# Altium PCB 按键板.PcbDoc
Units mm, origin at the board's own origin, x right, y up, seen from the top; angles counter-clockwise.
Board outline 52 x 61 mm, 2 copper layers (Top Layer, Bottom Layer); 15 components, 16 nets, 80 pads, 0 vias.
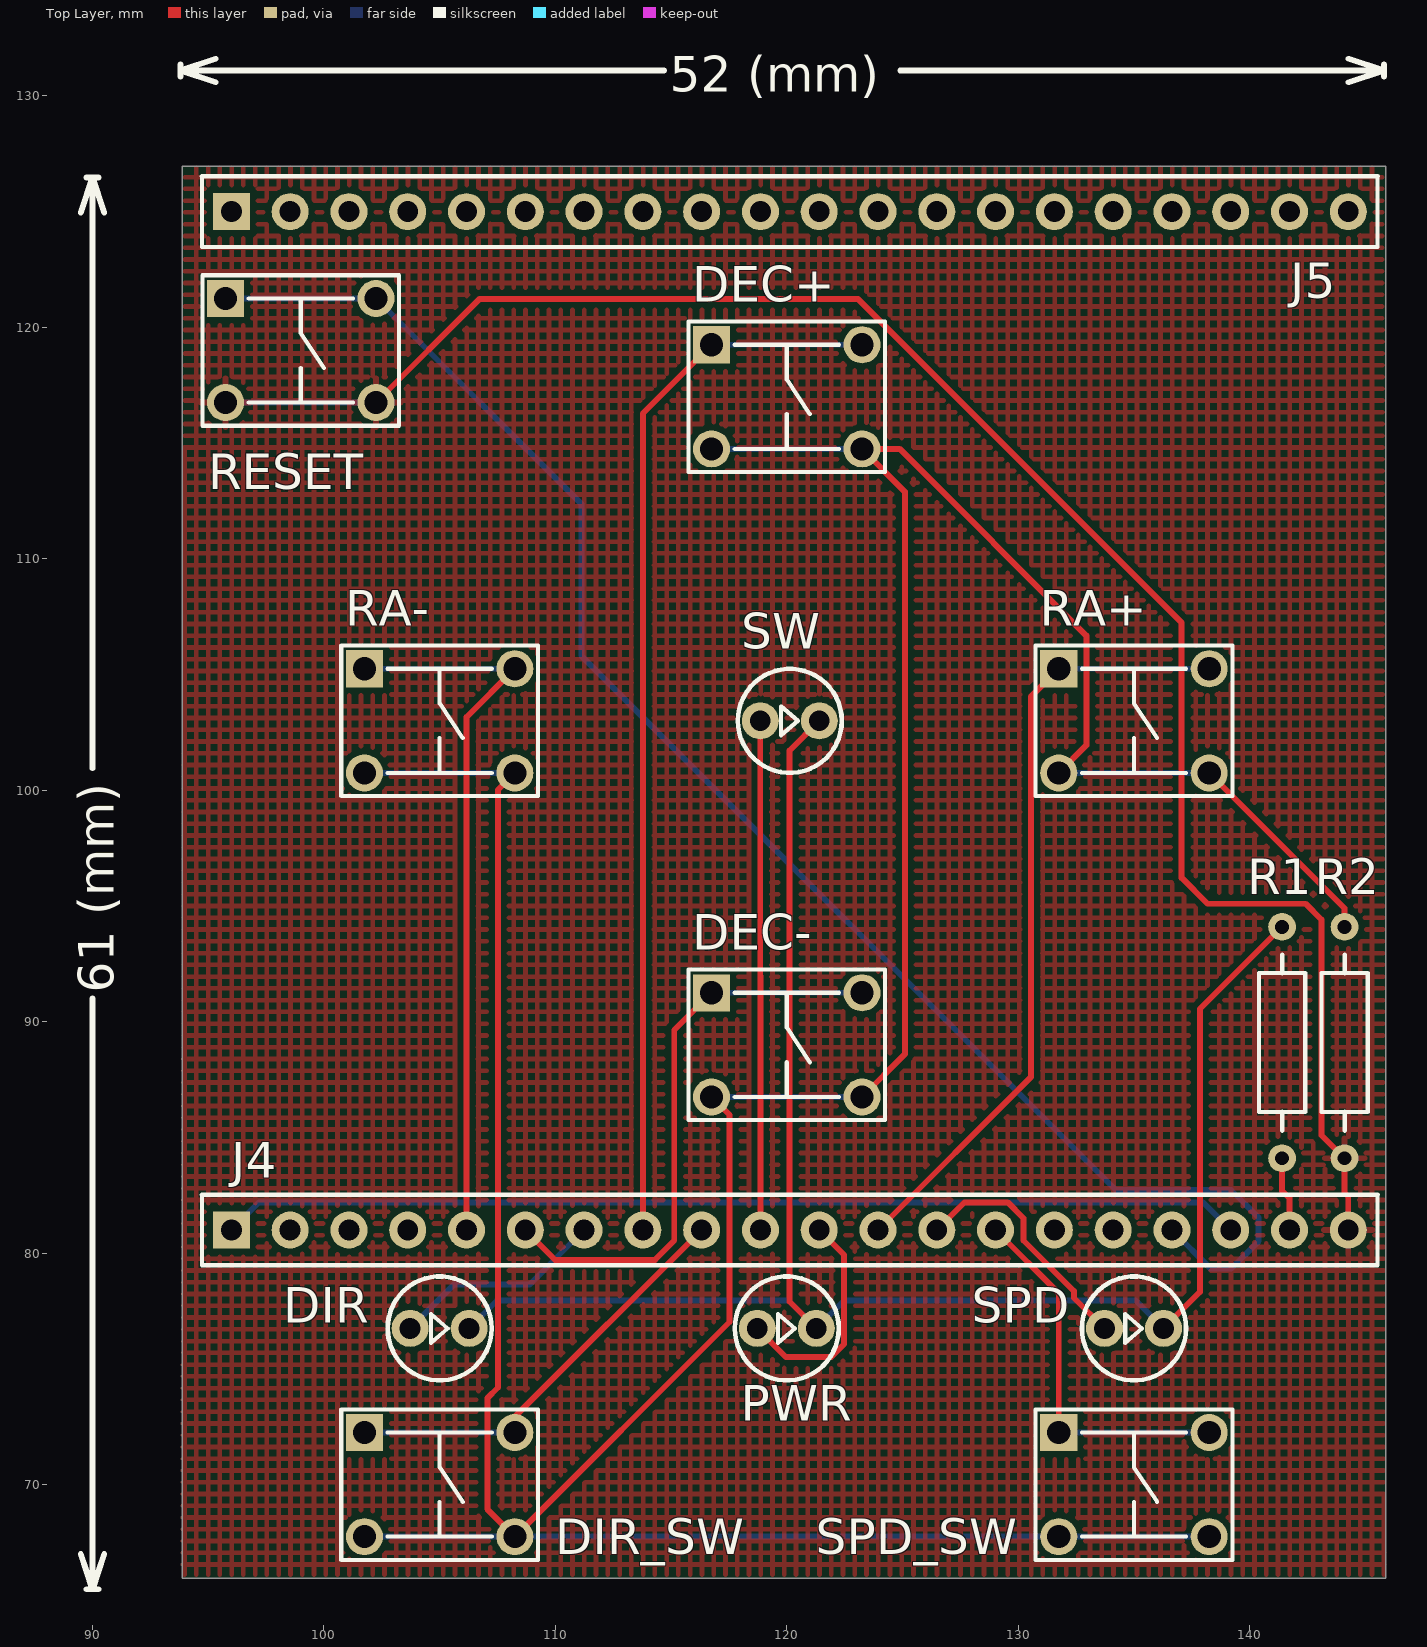
[diagram p0: Top Layer view]
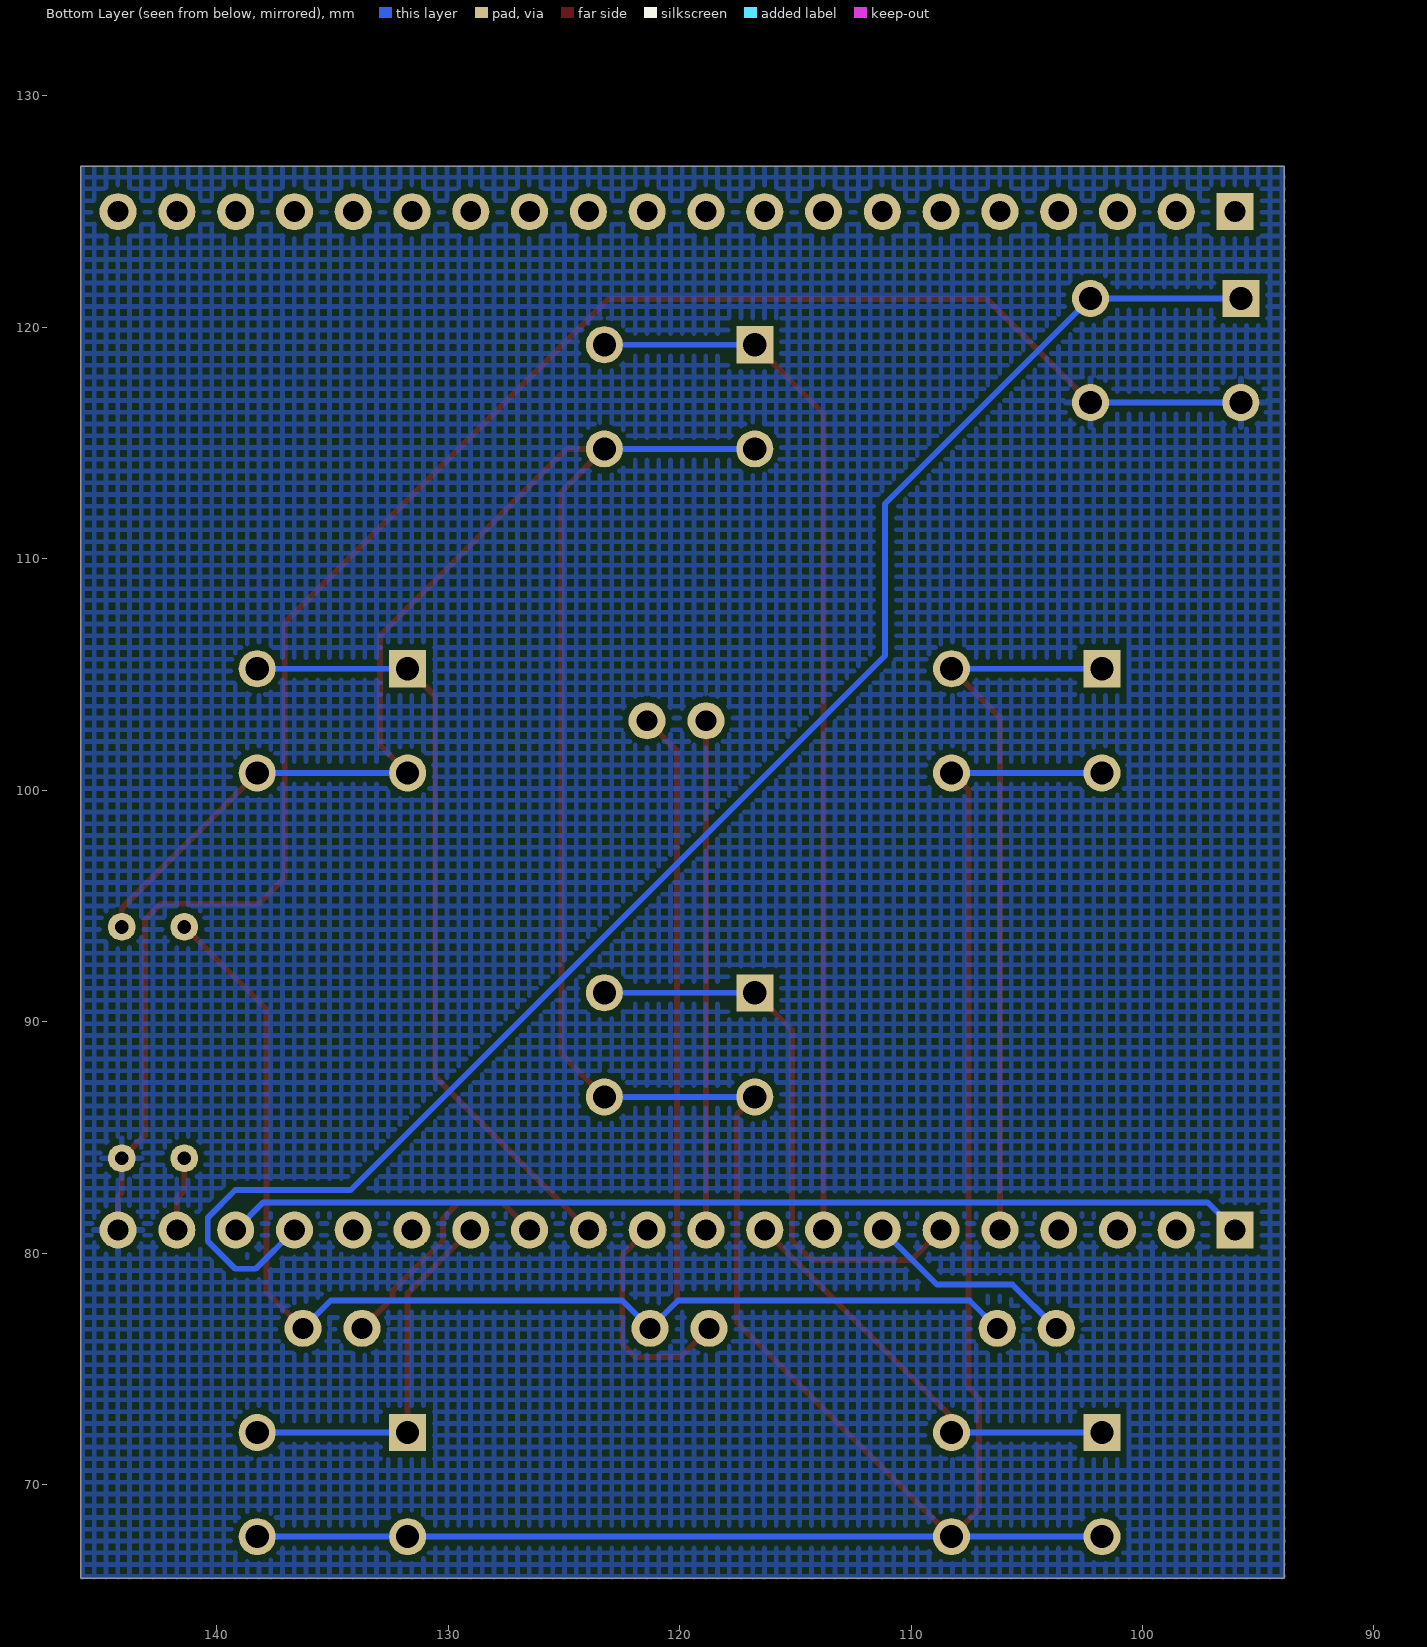
[diagram p1: Bottom Layer view, seen from below]

## Layer stack, top to bottom
Top Solder: solder mask 0.0102, Solder Resist, Dk 3.5
Top Layer: signal copper 0.0356
Dielectric 1: dielectric 0.32, FR-4, Dk 4.8
Bottom Layer: signal copper 0.0356
Bottom Solder: solder mask 0.0102, Solder Resist, Dk 3.5

## Board outline
93.875,65.952 93.875,126.952 145.875,126.952 145.875,65.952

## Design rules (kind name [scope] priority, off if disabled: settings)
Clearance [All] p1: gap=0.254
PolygonConnect [All] p1: connectstyle=Relief reliefconductorwidth=0.254 reliefentries=4 polygonreliefangle="90 Angle" airgapwidth=0.254
RoutingVias [All] p1: holewidth=0.711 width=1.27 viastyle="Through Hole" minholewidth=0.711 minwidth=1.27 maxholewidth=0.711 maxwidth=1.27
SolderMaskExpansion [All] p1: expansion=0.102
Width [All] p1: maxlimit=0.254 minlimit=0.254 preferedwidth=0.254
30 further rules are at their usual default settings.

## Components (designator, comment, footprint, x,y, rotation, side; value= is the part's Value field where it differs from the comment)
DEC+ "SW-PB" KEY 120,117 r0 top
DEC- "SW-PB" KEY 120,89 r0 top
DIR "LED" LED 105,76.75 r0 top
DIR_SW "SW-PB" KEY 105,70 r0 top
J4 "20脚排插" SIP20 96,81 r90 top
J5 "20脚排插" SIP20 96,125 r90 top
PWR "LED" LED 120,76.75 r0 top
R1 "10K" RESISTANCE 141.4,94.1 r270 top
R2 "10K" RESISTANCE 144.1,94.1 r270 top
RA+ "SW-PB" KEY 135,103 r0 top
RA- "SW-PB" KEY 105,103 r0 top
RESET "SW-PB" KEY 99,119 r0 top (schematic designator RESTE)
SPD "LED" LED 135,76.75 r0 top
SPD_SW "SW-PB" KEY 135,70 r0 top
SW "LED" LED 120.13,103 r0 top

## Footprints (in the part's own frame and the unit in brackets; to place one, negate y for a bottom-side part, rotate by r counter-clockwise, add the part's x,y. Pads: shape width x height; smd on the part's side, far side on the other; paste and mask are expansions set on the pad)
KEY [mm]
  rect 1.6x1.6 hole 1: 1(-3.25,2.25)
  round 1.6 hole 1: 1(3.25,2.25) 2(-3.25,-2.25) 2(3.25,-2.25)
  silkscreen extent -4.25,-3.25 4.25,3.25
LED [mm]
  round 1.6 hole 0.9: 1(-1.275,0) 2(1.275,0)
  silkscreen extent -2.25,-2.24 2.25,2.24
RESISTANCE [mm]
  round 1.2 hole 0.6: 1(0,0) 2(10,0)
  silkscreen extent 1.2,-1 8.8,1
SIP20 [mm]
  rect 1.6x1.6 hole 0.9: 1(0,0)
  round 1.6 hole 0.9: 2(0,-2.54) 3(0,-5.08) 4(0,-7.62) 5(0,-10.16) 6(0,-12.7) 7(0,-15.24) 8(0,-17.78) 9(0,-20.32) 10(0,-22.86) 11(0,-25.4) 12(0,-27.94) 13(0,-30.48) 14(0,-33.02) 15(0,-35.56) 16(0,-38.1) 17(0,-40.64) 18(0,-43.18) 19(0,-45.72) 20(0,-48.26)
  silkscreen extent -1.52,-49.53 1.52,1.27

## Part data
DEC+ DEC- DIR_SW RA+ RA- RESET SPD_SW: "Switch"
DIR PWR SPD SW: "Typical INFRARED GaAs LED"
R1 R2: "Resistor"

## Nets (pads, with @x,y where several pads share a name; then routed paths per layer and width w, separated by ;. In a path a pad name is that pad's centre, name@x,y a point inside that pad or via, vN(x,y) a via of type N, cw(c..) or ccw(c..) an arc to the next point about the centre after c; other vN are vias at no path point)
NetDEC+_1: DEC+.1 J4.8 | length 46
  Top Layer w0.254: J4.8 113.78,116.28 DEC+.1@116.75,119.25
  Bottom Layer w0.254: DEC+.1@116.75,119.25 DEC+.1@123.25,119.25
NetDEC+_2: DEC+.2 DEC-.2 DIR_SW.2 R2.1 RA+.2 RA-.2 SPD_SW.2 | length 177.7
  Top Layer w0.254: RA-.2@108.25,100.75 107.518,100.018 107.518,74.193 107.061,73.736 107.061,68.939 108.25,67.75 117.526,77.026 117.526,85.974 DEC-.2@116.75,86.75 ; DEC-.2@123.25,86.75 125.1,88.6 125.1,112.9 123.25,114.75 124.874,114.75 132.944,106.68 132.944,101.944 RA+.2@131.75,100.75 ; RA+.2@138.25,100.75 144.1,94.9 R2.1
  Bottom Layer w0.254: DIR_SW.2@101.75,67.75 108.25,67.75 131.75,67.75 SPD_SW.2@138.25,67.75 ; RA-.2@101.75,100.75 RA-.2@108.25,100.75 ; DEC-.2@116.75,86.75 DEC-.2@123.25,86.75 ; DEC+.2@116.75,114.75 DEC+.2@123.25,114.75 ; RA+.2@131.75,100.75 RA+.2@138.25,100.75
NetDEC-_1: DEC-.1 J4.6 | length 25.2
  Top Layer w0.254: J4.6 109.995,79.705 114.3,79.705 115.139,80.544 115.139,89.639 DEC-.1@116.75,91.25
  Bottom Layer w0.254: DEC-.1@116.75,91.25 DEC-.1@123.25,91.25
NetDIR_1: DIR.1 J4.7 | length 9.3
  Bottom Layer w0.254: DIR.1 105.613,78.638 108.878,78.638 J4.7
NetDIR_2: DIR.2 PWR.2 R1.1 SPD.2 SW.2 | length 78.7
  Top Layer w0.254: PWR.2 120.117,77.908 120.117,101.712 SW.2 ; SPD.2 137.846,78.321 137.846,90.546 R1.1
  Bottom Layer w0.254: DIR.2 107.478,77.953 120.072,77.953 PWR.2 122.478,77.953 135.072,77.953 SPD.2
NetDIR_SW_1: DIR_SW.1 J4.9 | length 18.6
  Top Layer w0.254: DIR_SW.1@108.25,72.25 108.25,72.93 J4.9
  Bottom Layer w0.254: DIR_SW.1@101.75,72.25 DIR_SW.1@108.25,72.25
NetJ4_1: J4.1 J4.18 | length 44.2
  Bottom Layer w0.254: J4.1 97.194,82.194 137.986,82.194 J4.18
NetJ4_5: J4.5 RA-.1 | length 31.6
  Top Layer w0.254: J4.5 106.16,103.16 RA-.1@108.25,105.25
  Bottom Layer w0.254: RA-.1@101.75,105.25 RA-.1@108.25,105.25
NetJ4_10: J4.10 SW.1 | length 22
  Top Layer w0.254: SW.1 118.855,91.978 118.86,91.973 J4.10
NetJ4_11: J4.11 PWR.1 | length 9.9
  Top Layer w0.254: PWR.1 119.961,75.514 121.92,75.514 122.479,76.073 122.479,79.921 J4.11
NetJ4_12: J4.12 RA+.1 | length 34
  Top Layer w0.254: J4.12 130.556,87.616 130.556,104.056 RA+.1@131.75,105.25
  Bottom Layer w0.254: RA+.1@131.75,105.25 RA+.1@138.25,105.25
NetJ4_13: J4.13 SPD.1 | length 10.7
  Top Layer w0.254: J4.13 127.674,82.194 129.54,82.194 130.226,81.509 130.226,80.543 132.41,78.359 132.41,78.065 SPD.1
NetJ4_14: J4.14 SPD_SW.1 | length 16.4
  Top Layer w0.254: J4.14 131.75,78.27 SPD_SW.1@131.75,72.25
  Bottom Layer w0.254: SPD_SW.1@131.75,72.25 SPD_SW.1@138.25,72.25
NetJ4_17: J4.17 RESET.1 | length 70.9
  Bottom Layer w0.254: RESET.1@95.75,121.25 102.25,121.25 111.125,112.375 111.125,105.816 134.214,82.728 139.192,82.728 140.386,81.534 140.386,80.518 139.192,79.324 138.316,79.324 J4.17
NetJ4_19: J4.19 R1.2 | length 3.2
  Top Layer w0.254: R1.2 141.4,82.692 141.72,82.372 J4.19
NetJ4_20: J4.20 R2.2 RESET.2 | length 80.7
  Top Layer w0.254: RESET.2@102.25,116.75 106.734,121.234 123.063,121.234 137.058,107.239 137.058,96.215 138.176,95.098 142.418,95.098 143.104,94.412 143.104,85.096 R2.2 144.1,82.608 144.26,82.448 J4.20
  Bottom Layer w0.254: RESET.2@95.75,116.75 RESET.2@102.25,116.75
pads on no net: J4.2 J4.3 J4.4 J4.15 J4.16 J5.1 J5.2 J5.3 J5.4 J5.5 J5.6 J5.7 J5.8 J5.9 J5.10 J5.11 J5.12 J5.13 J5.14 J5.15 J5.16 J5.17 J5.18 J5.19 J5.20

## Polygon pours and split planes (outlines as drawn)
NetJ4_20 on Bottom Layer "Top Layer-No Net" (hatched 90Degree grid 0.508 track 0.203, pour order 2): 93.9,126.9 145.8,126.9 145.8,66 93.9,66
NetJ4_20 on Top Layer "Top Layer-No Net" (hatched 90Degree grid 0.508 track 0.203, pour order 0): 94,126.9 145.725,126.9 145.8,66.1 93.9,66.1

## Silkscreen, mask and mechanical layers (free items; w line width, h text height)
Top Overlay:
  lines w0.254: 89.492,67.001 90,65.477 ; 89.492,124.953 90,126.477 ; 89.746,65.477 90.254,65.477 ; 89.746,126.477 90.254,126.477 ; 90,91 90,65.477 ; 90,100.954 90,126.477 ; 90.508,67.001 90,65.477 ; 90.508,124.953 90,126.477 ; 93.8,130.846 93.8,131.354 ; 95.324,130.592 93.8,131.1 ; 95.324,131.608 93.8,131.1 ; 114.696,131.1 93.8,131.1 ; 124.904,131.1 145.8,131.1 ; 144.276,130.592 145.8,131.1 ; 144.276,131.608 145.8,131.1 ; 145.8,130.846 145.8,131.354
  text "52 (mm)" at 114.95,130.186 h1.52
  text "61 (mm)" at 90.914,91.254 h1.52 r90
Mechanical 1:
  the board outline again, w0.178